# Altium PCB PCB_Horloge_DCF.PcbDoc
Units mil, origin at the board's own origin, x right, y up, seen from the top; angles counter-clockwise.
Board outline 3472.44 x 2590.55 mil, 2 copper layers (Top Layer, Bottom Layer); 28 components, 36 nets, 192 pads, 18 vias.
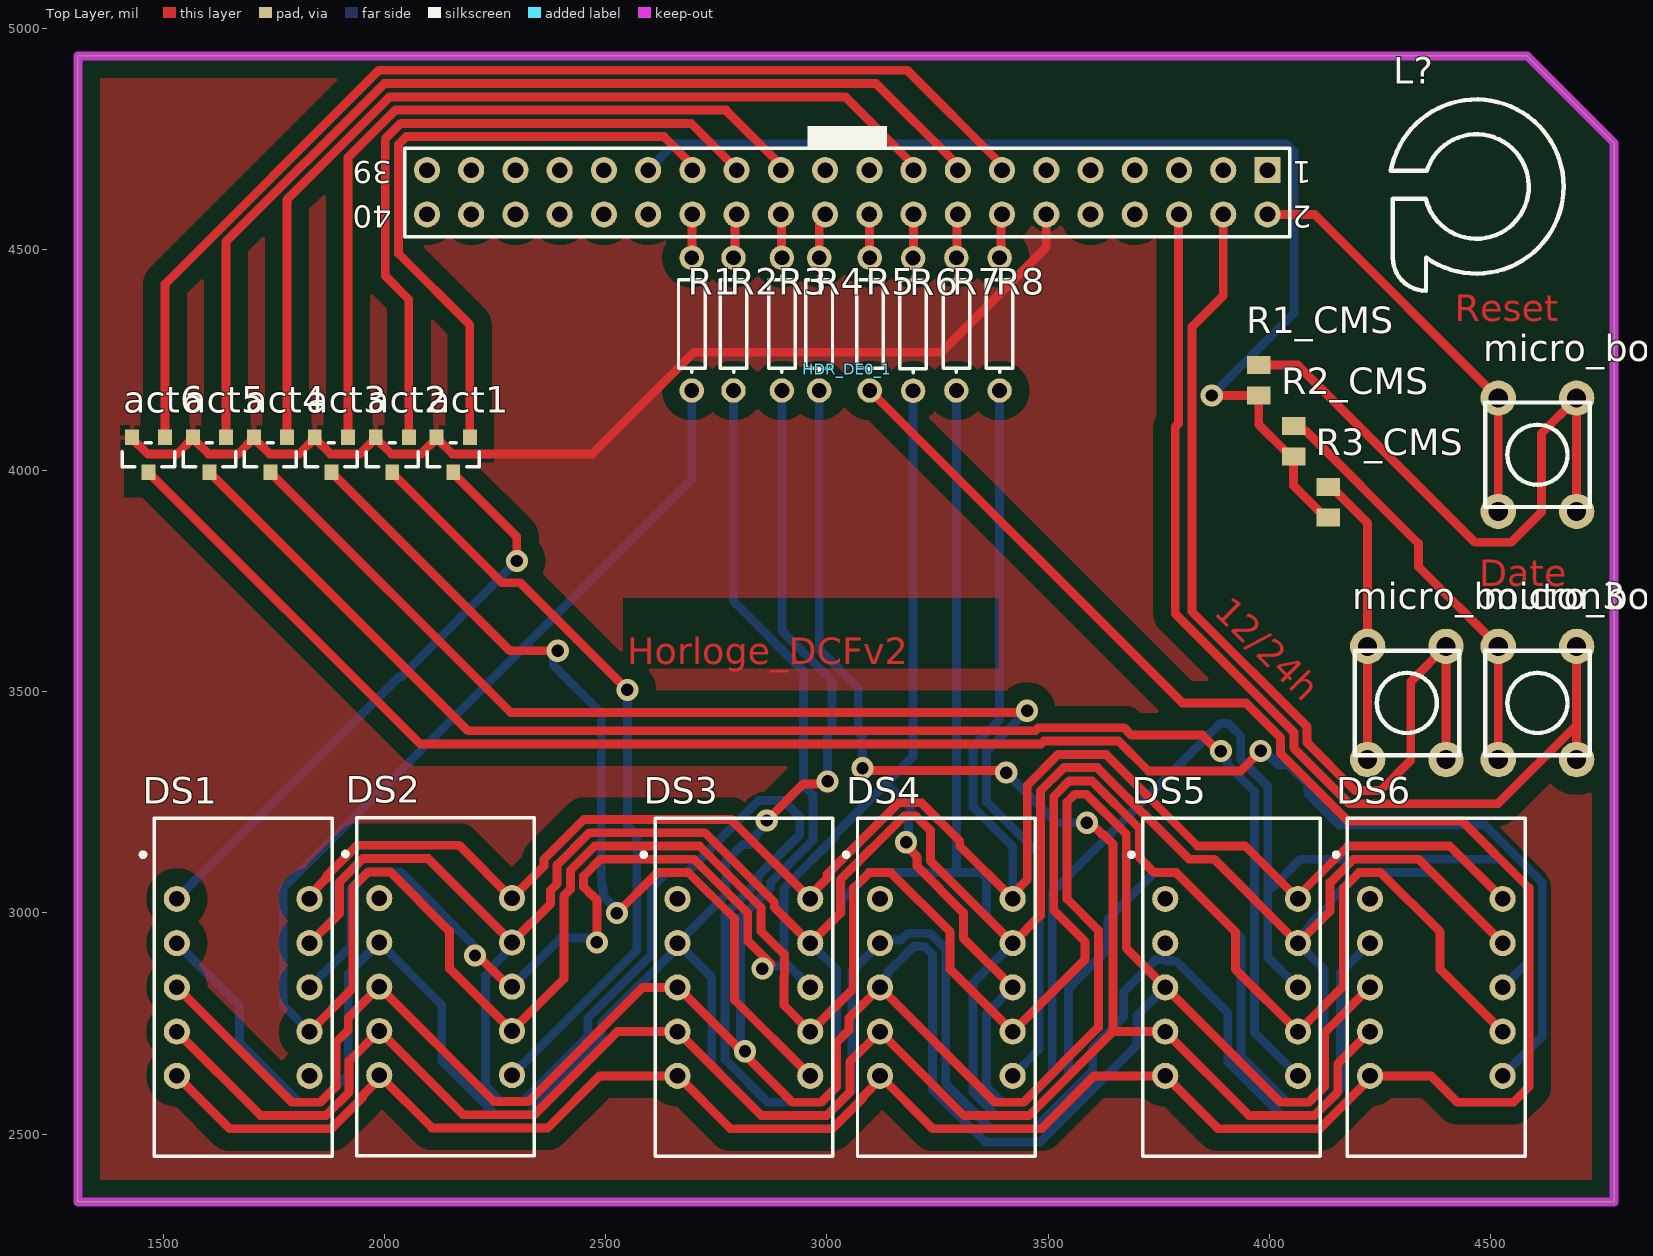
[diagram p0: Top Layer view]
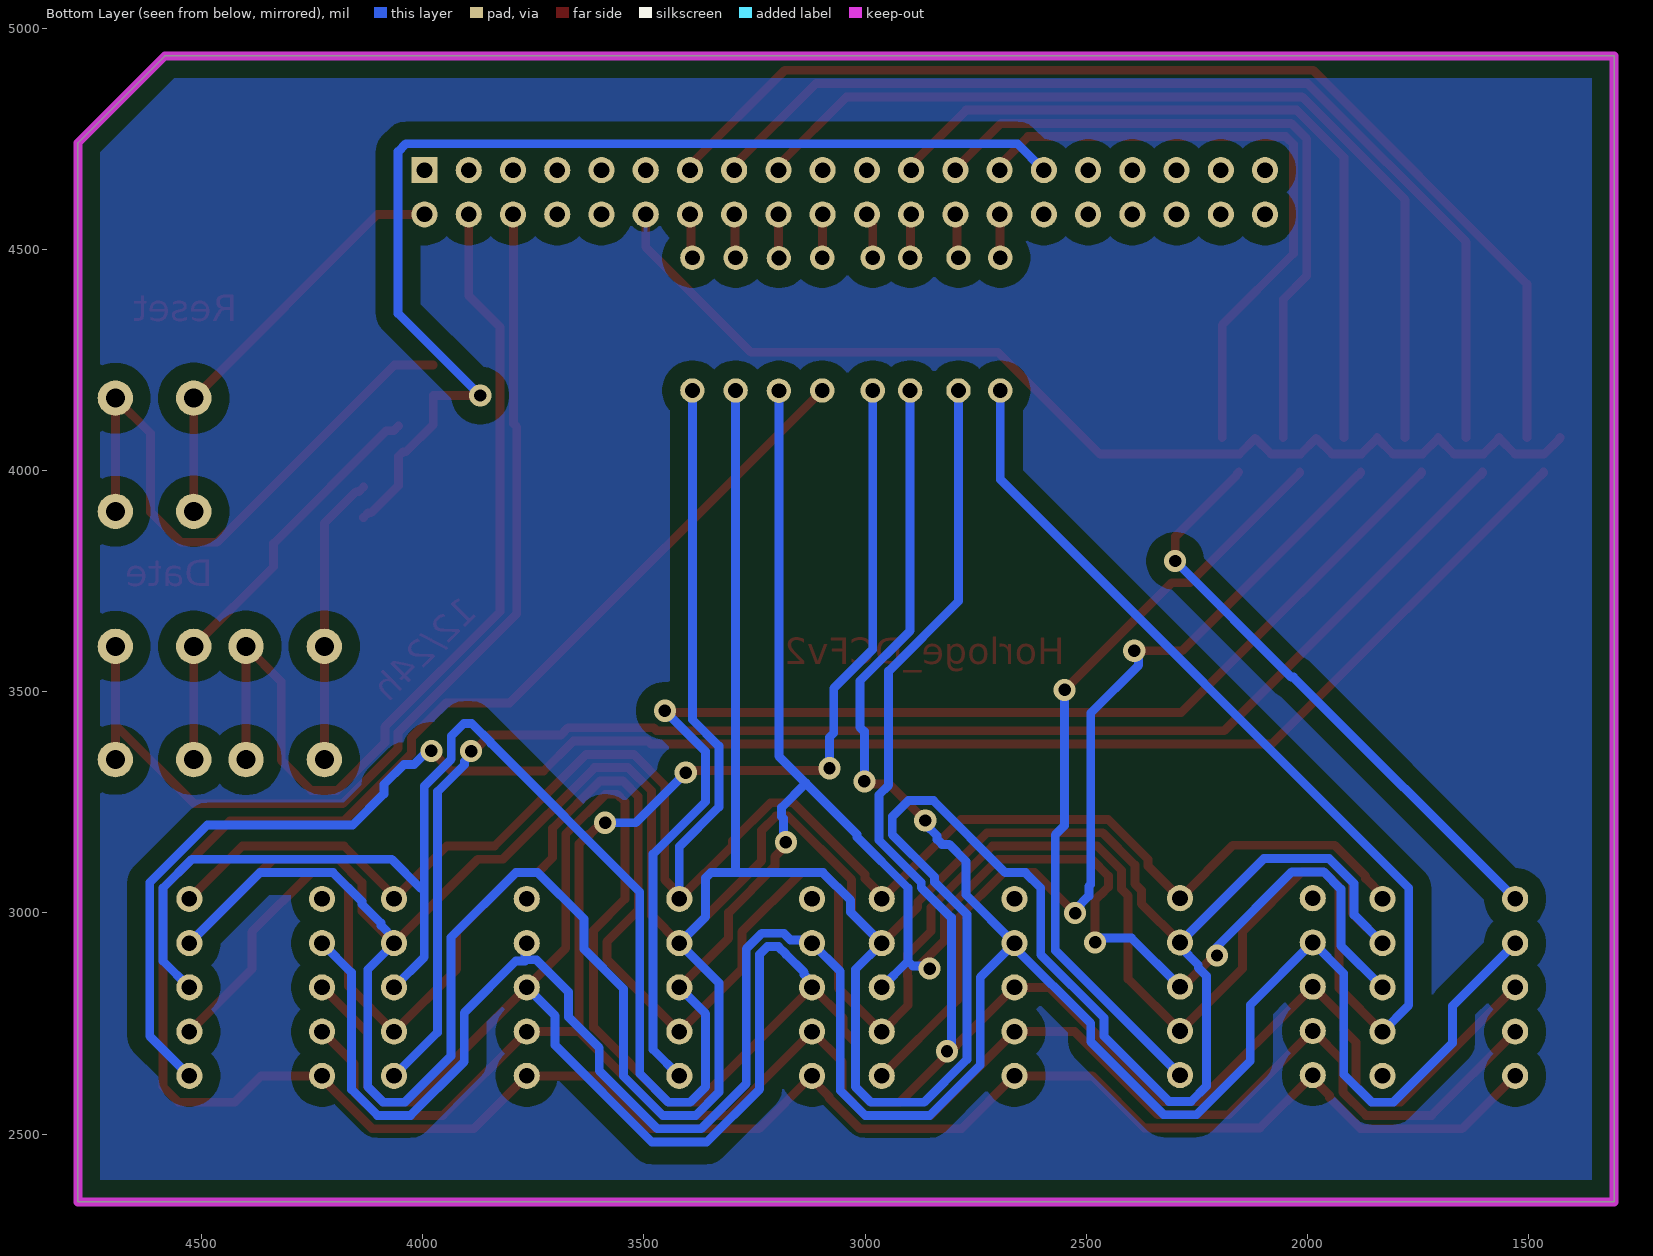
[diagram p1: Bottom Layer view, seen from below]

## Layer stack, top to bottom
Top Solder: solder mask 0.4, Solder Resist, Dk 3.5
Top Layer: signal copper 1.4
Dielectric 1: dielectric 12.6, FR-4, Dk 4.8
Bottom Layer: signal copper 1.4
Bottom Solder: solder mask 0.4, Solder Resist, Dk 3.5

## Board outline
1307.09,2346.46 4779.53,2346.46 4779.53,4740.16 4582.68,4937.01 1307.09,4937.01

## Design rules (kind name [scope] priority, off if disabled: settings)
Clearance [All] p1: gap=10 ignorepadtopadclearanceinfootprint=FALSE except(0: Arc-Hole Track-Hole SMDPad-Hole THPad-Hole Via-Hole Fill-Hole Poly-Hole Region-Hole Text-Hole; 20: Arc-THPad Track-THPad SMDPad-THPad THPad-THPad; 40: Arc-Poly Track-Poly SMDPad-Poly THPad-Poly Via-Poly Fill-Poly Poly-Poly)
PolygonConnect [All] p1: connectstyle=Relief reliefconductorwidth=10 reliefentries=4 polygonreliefangle="90 Angle" airgapwidth=10
RoutingVias [All] p1: holewidth=28 width=50 viastyle="Through Hole" minholewidth=28 minwidth=50 maxholewidth=28 maxwidth=50
SolderMaskExpansion [All] p1: expansion=4 istentingtop=FALSE
Width Width_1 [All] p1: maxlimit=20 minlimit=10 preferedwidth=20 minimp=50.000000 maximp=50.000000 favimp=50.000000
30 further rules are at their usual default settings.

## Components (designator, comment, footprint, x,y, rotation, side; value= is the part's Value field where it differs from the comment)
act1 "T_NMOS_60V_150mA_SOT23" Diodes_SOT23_0 2155.51,4035.43 r90 top
act2 "T_NMOS_60V_150mA_SOT23" Diodes_SOT23_0 2017.72,4035.43 r90 top
act3 "T_NMOS_60V_150mA_SOT23" Diodes_SOT23_0 1879.92,4035.43 r90 top
act4 "T_NMOS_60V_150mA_SOT23" Diodes_SOT23_0 1742.13,4035.43 r90 top
act5 "T_NMOS_60V_150mA_SOT23" Diodes_SOT23_0 1604.33,4035.43 r90 top
act6 "T_NMOS_60V_150mA_SOT23" Diodes_SOT23_0 1466.54,4035.43 r90 top
DS1 "5082-7613" A-10(14) 1680.71,2831.5 r0 top
DS2 "5082-7613" A-10(14) 2138.19,2833.07 r0 top
DS3 "5082-7613" A-10(14) 2812.6,2831.5 r0 top
DS4 "5082-7613" A-10(14) 3270.08,2831.5 r0 top
DS5 "5082-7613" A-10(14) 3914.96,2831.5 r0 top
DS6 "5082-7613" A-10(14) 4377.56,2831.5 r0 top
HDR_DE0_1 "Header_DE0" "ALTERA DE" 3046.06,4678.74 r180 top
L? "Component_1" POLYTECH_11MM_EMPTY 4468.5,4641.73 r0 top
micro_bouton1 "micro_bouton_poussoir" "Tactile Switch" 4606.3,4035.43 r0 top
micro_bouton2 "micro_bouton_poussoir" "Tactile Switch" 4606.3,3474.41 r180 top
micro_bouton3 "micro_bouton_poussoir" "Tactile Switch" 4311.02,3474.41 r180 top
R1 "Res1" AXIAL-0.3 2694.68,4330.71 r270 top value=15
R1_CMS "R_01K0_0805" RESC2012X05N 3976.38,4203.74 r270 top value=1K
R2 "Res1" AXIAL-0.3 2789.06,4330.71 r270 top value=15
R2_CMS "R_01K0_0805" RESC2012X05N 4055.12,4065.94 r270 top value=1K
R3 "Res1" AXIAL-0.3 2898.43,4330.71 r270 top value=15
R3_CMS "R_01K0_0805" RESC2012X05N 4133.86,3928.15 r270 top value=1K
R4 "Res1" AXIAL-0.3 2982.8,4330.71 r270 top value=15
R5 "Res1" AXIAL-0.3 3097.17,4330.71 r270 top value=15
R6 "Res1" AXIAL-0.3 3195,4330 r270 top value=15
R7 "Res1" AXIAL-0.3 3292.76,4330.71 r270 top value=15
R8 "Res1" AXIAL-0.3 3390.55,4330.71 r270 top value=15

## Footprints (in the part's own frame and the unit in brackets; to place one, negate y for a bottom-side part, rotate by r counter-clockwise, add the part's x,y. Pads: shape width x height; smd on the part's side, far side on the other; paste and mask are expansions set on the pad)
A-10(14) [mm] "LED, 7-Segment Display, 7.62 mm, RHD; 14 Leads (4 Absent); Row Space 7.62 mm; Pitch 2.54 mm"
  round 1.5 hole 0.9: 2(-3.81,5.08) 3(-3.81,2.54) 4(-3.81,0) 5(-3.81,-2.54) 6(-3.81,-5.08) 9(3.81,-5.08) 10(3.81,-2.54) 11(3.81,0) 12(3.81,2.54) 13(3.81,5.08)
  silkscreen extent -5.87,-9.7 5.1,9.7
"ALTERA DE" [mm] "Connector; Header; 20x2 Position"
  rect 1.5x1.5 hole 0.9: 1(-24.13,0)
  round 1.524 on Mech1: 1(1.27,20.32) 2(-1.27,20.32) 3(-3.81,20.32) 4(-6.35,20.32) 5(-8.89,20.32) 6(-11.43,20.32) 7(-13.97,20.32) 8(-16.51,20.32) 9(-19.05,20.32) 10(-21.59,20.32) 11(-24.13,20.32) 12(-24.13,22.86) 13(-21.59,22.86) 14(-19.05,22.86) 15(-16.51,22.86) 16(-13.97,22.86) 17(-11.43,22.86) 18(-8.89,22.86) 19(-6.35,22.86) 20(-3.81,22.86) 21(-1.27,22.86) 22(1.27,22.86) 23(3.81,22.86) 24(6.35,22.86) 25(8.89,22.86) 26(11.43,22.86) 27(13.97,22.86) 28(16.51,22.86) 29(19.05,22.86) 30(21.59,22.86) 31(24.13,22.86) 32(24.13,20.32) 33(21.59,20.32) 34(19.05,20.32) 35(16.51,20.32) 36(13.97,20.32) 37(11.43,20.32) 38(8.89,20.32) 39(6.35,20.32) 40(3.81,20.32)
  round 1.5 hole 0.9: 2(-24.13,2.54) 3(-21.59,0) 4(-21.59,2.54) 5(-19.05,0) 6(-19.05,2.54) 7(-16.51,0) 8(-16.51,2.54) 9(-13.97,0) 10(-13.97,2.54) 11(-11.43,0) 12(-11.43,2.54) 13(-8.89,0) 14(-8.89,2.54) 15(-6.35,0) 16(-6.35,2.54) 17(-3.81,0) 18(-3.81,2.54) 19(-1.27,0) 20(-1.27,2.54) 21(1.27,0) 22(1.27,2.54) 23(3.81,0) 24(3.81,2.54) 25(6.35,0) 26(6.35,2.54) 27(8.89,0) 28(8.89,2.54) 29(11.43,0) 30(11.43,2.54) 31(13.97,0) 32(13.97,2.54) 33(16.51,0) 34(16.51,2.54) 35(19.05,0) 36(19.05,2.54) 37(21.59,0) 38(21.59,2.54) 39(24.13,0) 40(24.13,2.54)
  silkscreen extent -25.4,-2.54 25.4,3.81, body extent -25.52,-1.23 25.53,3.77, height 3.15
AXIAL-0.3 [mm] "Axial Device, Thru-Hole; 2 Leads; 0.3 in Pin Spacing"
  round 1.4 hole 0.85: 1(-3.81,0) 2(3.81,0)
  silkscreen extent -2.77,-0.76 2.77,0.76
Diodes_SOT23_0 [mm]
  rect 0.9x0.8 smd paste+0 mask+0: 1(-1,0) 2(1,-0.95) 3(1,0.95)
  silkscreen extent -0.7,-1.5 0.7,1.5, body extent -1.2,-1.45 1.3,1.45, height 1.02
POLYTECH_11MM_EMPTY [mil]
  silkscreen extent -194,-236 197,197
RESC2012X05N [mm] "Chip Resistor, 2-Leads, Body 2,00x1,25mm, IPC Medium Density"
  rect 1.05x1.35 smd: 1(-0.875,0) 2(0.875,0)
  body extent -1.05,-0.67 1.05,0.67, height 0.5
"Tactile Switch" [mm] "Bouton poussoir tactile traversant"
  round 2.032 hole 1.1: 1(-2.25,-3.25) 1(-2.25,3.25) 2(2.25,-3.25) 2(2.25,3.25)
  silkscreen extent -3,-3 3,3, body extent -3.01,-3.77 3.02,3.97, height 5.01

## Part data
act1 act2 act3 act4 act5 act6: "BS170F MOSFET N-CH 60V 150mA SOT23", Supplier Part Number 1=9227822, Mounting=YES, Supplier 1=RSComponents
DS1 DS2 DS3 DS4 DS5 DS6: "7.62 mm HER 7-Segment Display: CC, RH DP", LED_Colour="High Efficiency Red (HER)", PackageDocument=27-Aug-2001, ComponentLink1Description="Manufacturer Link", ComponentLink1URL=http://www.agilent.com/, ComponentLink2Description=Datasheet, ComponentLink2URL=http://cp.literature.agilent.com/litweb/pdf/5988-3325EN.pdf, DatasheetDocument=27-Aug-2001, LatestRevisionDate=11-Oct-2004, LatestRevisionNote="Display outline superimposed on PCB Footprint.", LuminousIntensity="340 ucd (Minimum).", Note="Pins 2 and 9 are redundant Cathodes.", PackageReference=A-10(14), Published=26-May-2004, Publisher="Altium Limited"
HDR_DE0_1: "HE10 40pins DE0", Supplier Part Number 1=2217597, Supplier 1=Farnell
L?: "Logo_POLYTECH"
micro_bouton1 micro_bouton2 micro_bouton3: Supplier Part Number 1=1555991, Supplier 1=Farnell, Supplier 2=Farnell, Supplier Part Number 2=1555982
R1 R2 R3 R4 R5 R6 R7 R8: "Resistor", LatestRevisionDate=17-Jul-2002, LatestRevisionNote="Re-released for DXP Platform.", PackageDescription="Axial Device, Thru-Hole; 2 Leads; 0.3 in Pin Spacing", PackageReference=AXIAL-0.3, Published=8-Jun-2000, Publisher="Altium Limited"
R1_CMS R2_CMS R3_CMS: "Resistor 1K Ohms 1/4W 0805 1%", Mounting=YES

## Via types
v1: diameter 50, hole 28, Top Layer to Bottom Layer, 18 vias

## Nets (pads, with @x,y where several pads share a name; then routed paths per layer and width w, separated by ;. In a path a pad name is that pad's centre, name@x,y a point inside that pad or via, vN(x,y) a via of type N, cw(c..) or ccw(c..) an arc to the next point about the centre after c; other vN are vias at no path point)
GND: act1.3 act2.3 act3.3 act4.3 act5.3 act6.3 HDR_DE0_1.12@3496.06,4578.74 | length 2505.3
  Top Layer w20: act6.3 1429.13,4072.83 1464.88,4037.09 1531.18,4037.09 act5.3@1566.93,4072.83 ; act5.3 act5.3@1566.93,4072.83 ; act4.3 act4.3@1704.72,4072.83 ; act3.3 act3.3@1842.52,4072.83 ; HDR_DE0_1.12@3496.06,4578.74 3496.06,4504.82 3258.46,4267.22 2699.79,4267.22 2469.66,4037.09 2153.86,4037.09 2118.11,4072.83 2082.36,4037.09 2016.06,4037.09 1980.32,4072.83 1944.57,4037.09 1878.27,4037.09 act3.3@1842.52,4072.83 ; act5.3@1566.93,4072.83 1602.68,4037.09 1668.98,4037.09 act4.3@1704.72,4072.83 ; act4.3@1704.72,4072.83 1740.47,4037.09 1806.77,4037.09 act3.3@1842.52,4072.83
Netact1_1: act1.1 DS1.2 | length 1345.2
  Top Layer w20: act1.1 2161.26,3990.31 2161.26,3988.35 2299.21,3850.39 v1(2299.21,3795.28)
  Bottom Layer w20: DS1.2 2032.17,3532.95 2036.89,3532.95 v1(2299.21,3795.28)
Netact1_2: act1.2 HDR_DE0_1.27@2696.06,4678.74 | length 1420.2
  Top Layer w20: act1.2 2192.91,4329.13 2031.81,4490.23 2031.81,4736.84 2049.39,4754.41 2631.81,4754.41 HDR_DE0_1.27@2691.34,4694.88
Netact2_1: act2.1 DS2.9 | length 1733
  Top Layer w20: act2.1 2017.72,3994.09 2265.67,3746.14 2307.01,3746.14 v1(2549.21,3503.94)
  Bottom Layer w20: DS2.9 2570.32,2915.2 2570.32,3176.6 2549.21,3197.7 v1(2549.21,3503.94)
Netact2_2: act2.2 HDR_DE0_1.25@2796.06,4678.74 | length 1537.7
  Top Layer w20: act2.2 2055.12,4386.36 2001.81,4439.67 2001.81,4749.26 2036.96,4784.41 2692.85,4784.41 2782.38,4694.88 HDR_DE0_1.25@2791.34,4694.88
Netact3_1: act3.1 DS3.9 | length 2100.9
  Top Layer w20: act3.1 1879.92,3994.09 1885.67,3988.35 1887.64,3988.35 2283.46,3592.52 v1(2391.73,3592.52) ; v1@2522.2,2996.12 2617.1,3091.02 2687.26,3091.02 2791.19,2987.09 2791.19,2802.9 DS3.9
  Bottom Layer w20: v1@2381.89,3582.68 2381.89,3559.94 2490.16,3451.67 2490.16,3064.24 2494.27,3060.12 2494.27,3038.39 2525.32,3007.35 v1(2525.32,2999.23)
Netact3_2: act3.2 HDR_DE0_1.23@2896.06,4678.74 | length 1700.3
  Top Layer w20: act3.2 1917.32,4707.2 2024.53,4814.41 2771.81,4814.41 HDR_DE0_1.23@2891.34,4694.88
Netact4_1: act4.1 DS4.9 | length 2875.9
  Top Layer w20: act4.1 1742.13,3994.09 1747.87,3988.35 1749.84,3988.35 2285.43,3452.76 3448.82,3452.76 v1(3452.76,3456.69)
  Bottom Layer w20: DS4.9 3479.61,2691.02 3479.61,3132.62 3360.51,3251.71 3360.51,3364.45 v1(3452.76,3456.69)
Netact4_2: act4.2 HDR_DE0_1.17@3196.06,4678.74 | length 2107.1
  Top Layer w20: act4.2 1779.53,4611.83 2012.11,4844.41 3041.81,4844.41 HDR_DE0_1.17@3191.34,4694.88
Netact5_1: act5.1 DS5.9 | length 3360.3
  Top Layer w20: act5.1 1604.33,3994.09 1610.08,3988.35 1612.05,3988.35 2188.7,3411.69 3471.4,3411.69 3477.89,3418.19 3671.81,3418.19 3688.43,3401.57 3848.79,3401.57 3884.77,3365.6 v1(3890.59,3365.6)
  Bottom Layer w20: v1(3890.59,3365.6) 3890.59,3357.48 3905.59,3342.48 3905.59,3334.96 3966.65,3273.9 3966.65,2729.8 DS5.9
Netact5_2: act5.2 HDR_DE0_1.15@3296.06,4678.74 | length 2313.9
  Top Layer w20: act5.2 1641.73,4516.46 1999.68,4874.41 3111.81,4874.41 HDR_DE0_1.15@3291.34,4694.88
Netact6_1: act6.1 DS6.9 | length 4065.5
  Top Layer w20: act6.1 1466.54,3994.09 1472.28,3988.35 1474.25,3988.35 2080.91,3381.69 3483.82,3381.69 3490.32,3388.19 3659.38,3388.19 3726.98,3320.6 3935.16,3320.6 v1(3980.59,3366.03)
  Bottom Layer w20: v1(3980.59,3366.03) 3988.71,3366.03 4019.12,3335.61 4042.1,3335.61 4087.75,3289.97 4087.75,3268.75 4158.07,3198.43 4487.23,3198.43 4617.09,3068.58 4617.09,2721.02 DS6.9
Netact6_2: act6.2 HDR_DE0_1.13@3396.06,4678.74 | length 2520.7
  Top Layer w20: act6.2 1503.94,4421.09 1987.25,4904.41 3181.81,4904.41 HDR_DE0_1.13@3391.34,4694.88
NetDS1_3: DS1.3 DS2.3 DS3.3 DS4.3 DS5.3 DS6.3 R3.2 | length 6831.2
  Top Layer w20: v1(2864.17,3208.66) 2947.02,3291.5 2996.1,3291.5 v1(3001.84,3297.24)
  Bottom Layer w20: DS1.3 1672.12,2790.09 1672.12,2705.9 1806.05,2571.97 1855.37,2571.97 1918.04,2634.64 1918.04,2862.92 DS2.3 2129.6,2791.66 2129.6,2665.05 2251.11,2543.54 2325.27,2543.54 2490.2,2708.47 2490.2,2750.23 2662.6,2922.63 DS3.3 ; v1(2864.17,3208.66) 2864.17,3200.54 2837.27,3173.64 2837.27,3165.97 2826.11,3154.81 2810.32,3154.81 2772.04,3116.53 2772.04,3040.94 DS3.3 ; R3.2 2898.43,3637.49 3011.81,3524.11 3011.81,3419.72 3001.84,3409.75 v1(3001.84,3297.24) ; 3760.78,2893.92 3743.2,2893.92 3670.71,2821.43 3670.71,2764.75 3601.11,2695.16 3601.11,2643.49 3469.59,2511.97 3370.57,2511.97 3268.66,2613.88 3268.66,2918.55 3233.51,2953.7 3183.81,2953.7 3169.08,2938.97 3127.55,2938.97 DS4.3 3056.14,2867.56 3056.14,2598.43 2999.68,2541.97 2853.93,2541.97 2739.96,2655.94 2739.96,2854.13 DS3.3 ; DS5.3 3769.15,2927.31 3769.15,2891.02 3789.62,2891.02 3906.37,2774.27 3906.37,2663.48 4027.88,2541.97 4102.04,2541.97 4161.07,2600.99 4161.07,2865 DS6.3
NetDS1_4: DS1.4 DS2.4 DS3.4 DS4.4 DS5.4 DS6.4 R2.2 | length 7788
  Top Layer w20: DS1.4 1790.24,2571.97 1855.37,2571.97 1890.24,2606.84 1890.24,2706.84 1918.04,2734.64 1918.04,2762.92 DS2.4 2247.72,2573.54 2326.18,2573.54 2584.13,2831.5 DS3.4 2922.13,2571.97 2987.26,2571.97 3022.13,2606.84 3022.13,2706.84 3049.93,2734.64 3049.93,2761.35 DS4.4 3379.61,2571.97 3444.74,2571.97 3613.93,2741.16 3613.93,2960.34 3542.83,3031.43 3542.83,3250.62 3560.41,3268.19 3586.79,3268.19 3676.69,3178.29 3676.69,2919.77 DS5.4 4024.49,2571.97 4089.62,2571.97 4124.85,2607.2 4124.85,2728.79 DS6.4
  Bottom Layer w20: R2.2 2789.06,3704.44 2947.13,3546.37 2947.13,3288.31 2968.7,3266.74 2968.7,3164.21 2873.07,3068.58 2873.07,3057.12 2805.12,2989.16 v1@2805.12,2677.17 ; DS4.4 3120.08,2842.06 3138.1,2860.08 3138.1,2865.33 3178.66,2905.89 3178.66,2906.13 3196.24,2923.7 3221.09,2923.7 3238.66,2906.13 3238.66,2601.45 3358.14,2481.97 3482.02,2481.97 3700.71,2700.66 3700.71,2767.24 DS5.4
  other v1: 2814.96,2687.01
NetDS1_5: DS1.5 DS2.5 DS3.5 DS4.5 DS5.5 DS6.5 R4.2 | length 5556.9
  Top Layer w20: DS1.5 1720.24,2541.97 1867.79,2541.97 1920.24,2594.41 1920.24,2665.12 DS2.5 2177.72,2543.54 2338.61,2543.54 2526.56,2731.5 DS3.5 2852.13,2541.97 2999.68,2541.97 3052.13,2594.41 3052.13,2663.54 DS4.5 3309.61,2541.97 3457.16,2541.97 3646.69,2731.5 ; v1(3080.71,3326.77) 3085.63,3321.85 3400.59,3321.85 v1(3405.51,3316.93) ; v1(3587.83,3203.5) 3595.95,3203.5 3622.19,3177.26 3625.23,3177.26 3646.69,3155.81 3646.69,2731.5 ; DS6.5 4154.85,2658.79 4154.85,2594.78 4102.04,2541.97 3954.49,2541.97 DS5.5 3646.69,2731.5
  Bottom Layer w20: R4.2 2982.8,3595.55 3070.87,3507.48 3070.87,3406.42 3080.71,3396.58 v1(3080.71,3326.77) ; v1(3405.51,3316.93) 3518.94,3203.5 v1(3587.83,3203.5)
NetDS1_6: DS1.6 DS2.6 DS3.6 DS4.6 DS5.6 DS6.6 R5.2 | length 6043.4
  Top Layer w20: DS1.6 1650.24,2511.97 1880.22,2511.97 1950.24,2581.99 1950.24,2586.84 1988.19,2624.79 DS2.6 2107.72,2513.54 2368.8,2513.54 2486.76,2631.5 DS3.6 2782.13,2511.97 3012.11,2511.97 3082.13,2581.99 3082.13,2585.26 3120.08,2623.22 DS4.6 3239.61,2511.97 3485.14,2511.97 3604.67,2631.5 DS5.6 3884.49,2511.97 4114.47,2511.97 4227.56,2625.06 DS6.6 4365.41,2631.5 4424.94,2571.97 4552.22,2571.97 4587.09,2606.84 4587.09,3056.15 4435.43,3207.81 4177.24,3207.81 4025.59,3359.46 4025.59,3395.67 3946.85,3474.41 3803.46,3474.41 R5.2
  Bottom Layer w20: R5.2@3091.26,4174.8 R5.2
NetDS1_10: DS1.10 DS2.10 DS3.10 DS4.10 DS5.10 DS6.10 R1.2 | length 7446.8
  Top Layer w20: DS1.10 1928.66,2829.45 1928.66,3057.73 1963.53,3092.6 2012.85,3092.6 2146.78,2958.66 2146.78,2874.48 DS2.10 2405.56,2850.44 2405.56,3038.54 2420.32,3053.29 2420.32,3095.72 2475.62,3151.02 2712.11,3151.02 2851.19,3011.94 2851.19,2958.72 2904.02,2905.89 2904.02,2857.1 2903.07,2856.15 2903.07,2791.02 DS3.10 3060.55,2829.45 3060.55,3056.15 3095.42,3091.02 3144.74,3091.02 3278.67,2957.09 3278.67,2872.9 DS4.10 3583.93,2895.34 3583.93,2934.65 3512.83,3005.74 3512.83,3263.04 3547.98,3298.19 3599.22,3298.19 3706.69,3190.71 3706.69,3124.64 3740.3,3091.02 3789.62,3091.02 3923.55,2957.09 3923.55,2872.9 DS5.10 4167.67,2834.2 4167.67,3055.79 4202.9,3091.02 4252.22,3091.02 4386.15,2957.09 4386.15,2872.9 DS6.10
  Bottom Layer w20: DS1.10 1771.18,2791.02 1771.18,3056.15 2694.68,3979.66 R1.2
NetDS1_11: DS1.11 DS2.11 DS3.11 DS4.11 DS5.11 DS6.11 R6.2 | length 6796.1
  Top Layer w20: v1(2204.72,2903.54) 2211.22,2903.54 2281.69,2833.07 DS2.11 ; v1(2480.32,2933.07) 2480.32,3029.15 2468.6,3040.87 2467.89,3040.87 2450.32,3058.44 2450.32,3083.29 2488.05,3121.02 2699.68,3121.02 2821.19,2999.52 2821.19,2936.68 v1@2874.02,2883.86 ; v1(3179.13,3159.45) 3179.13,3151.33 3203.98,3126.49 3203.98,3105.17 3308.67,3000.48 3308.67,2942.9 DS4.11
  Bottom Layer w20: DS1.11 1924.64,2925.43 1924.64,3053.71 1963.53,3092.6 2035.35,3092.6 v1@2204.72,2923.23 ; DS2.11 2398.03,2942.91 v1@2470.47,2942.91 ; v1(2854.33,2874.02) 2860.07,2879.76 2891.8,2879.76 2903.07,2891.02 ; DS3.11 2903.07,2891.02 ; v1(3179.13,3159.45) 3184.87,3165.19 3184.87,3213.31 3188.98,3217.41 3188.98,3238.19 3134.04,3293.12 ; R6.2 3195,3354.08 3134.04,3293.12 ; DS4.11 3360.55,2771.97 3360.55,2606.84 3395.42,2571.97 3444.74,2571.97 3509.61,2636.84 3509.61,3047.01 3845.59,3382.99 3845.59,3384.24 3889.42,3428.06 3907.23,3428.06 3935.59,3399.7 3935.59,3347.39 3996.65,3286.32 3996.65,3056.15 3996.65,2899.8 DS5.11 ; 4005.43,3056.15 4070.3,3121.02 4522.22,3121.02 4587.09,3056.15 4587.09,2891.02 DS6.11 ; 2903.07,2891.02 2903.07,3056.15 3018.56,3171.64 3018.56,3177.64 3134.04,3293.12
NetDS1_12: DS1.12 DS2.12 DS3.12 DS4.12 DS5.12 DS6.12 R7.2 | length 12241.6
  Top Layer w20: DS1.12 1898.66,2999.45 1898.66,3070.15 1951.11,3122.6 2098.66,3122.6 DS2.12 2375.56,3020.44 2375.56,3050.97 2390.32,3065.72 2390.32,3108.15 2463.19,3181.02 2724.53,3181.02 2881.19,3024.37 2881.19,3012.9 DS3.12 3030.55,2999.45 3030.55,3074.51 3175.02,3218.98 3201.4,3218.98 3233.98,3186.4 3233.98,3117.6 DS4.12 3482.83,2994.25 3482.83,3275.47 3535.56,3328.19 3611.64,3328.19 3818.81,3121.02 3875.43,3121.02 DS5.12 4137.67,3004.2 4137.67,3068.22 4190.48,3121.02 4338.03,3121.02 DS6.12
  Bottom Layer w20: DS1.12 1894.64,2995.43 1894.64,3066.14 1951.11,3122.6 2098.66,3122.6 DS2.12 2288.19,2923.37 2246.93,2882.11 2246.93,2876 2228.66,2857.73 2228.66,2608.41 2263.53,2573.54 2312.85,2573.54 2460.2,2720.9 2460.2,2762.65 2603.07,2905.53 2603.07,3056.15 2637.94,3091.02 2682.9,3091.02 2845.53,3253.66 2902.5,3253.66 2938.7,3217.46 2938.7,3176.64 2843.07,3081.01 2843.07,3069.54 2769.96,2996.43 2769.96,2668.37 2866.36,2571.97 2987.26,2571.97 3022.13,2606.84 3022.13,2871.97 DS3.12 3032.75,3001.64 3032.75,3028.35 3095.42,3091.02 3287.4,3091.02 ; R7.2 3292.76,3096.38 3287.4,3091.02 ; DS6.12 4368.03,3091.02 4202.9,3091.02 4137.67,3025.79 4137.67,3020.02 4094.49,2976.84 4094.49,2971.59 4064.96,2942.06 DS5.12 4124.49,2871.97 4124.49,2606.84 4089.62,2571.97 4040.3,2571.97 3936.37,2675.9 3936.37,2944.27 3789.62,3091.02 3740.3,3091.02 3635.34,2986.06 3635.34,2917.58 3546.25,2828.5 3546.25,2631.06 3457.16,2541.97 3383,2541.97 3330.55,2594.41 3330.55,2841.97 DS4.12 3360.55,2991.02 3360.55,3079.31 3348.84,3091.02 3287.4,3091.02
NetDS1_13: DS1.13 DS2.13 DS3.13 DS4.13 DS5.13 DS6.13 R8.2 | length 4873.9
  Top Layer w20: DS1.13 1830.71,3039.78 1868.66,3077.73 1868.66,3082.58 1938.68,3152.6 2168.66,3152.6 DS2.13 2360.32,3105.2 2360.32,3120.57 2450.77,3211.02 2783.07,3211.02 DS3.13 2962.6,3039.78 3000.55,3077.73 3000.55,3086.93 3162.6,3248.98 3213.83,3248.98 3300.55,3162.25 3300.55,3151.02 DS4.13 3420.08,3042.06 3452.83,3074.82 3452.83,3287.89 3523.13,3358.19 3630.7,3358.19 3837.86,3151.02 3945.43,3151.02 DS5.13 4064.96,3037.93 4178.05,3151.02 4408.03,3151.02 DS6.13
  Bottom Layer w20: R8.2 3390.55,3436.91 3330.51,3376.88 3330.51,3239.29 3420.08,3149.72 DS4.13
NetHDR_DE0_1_2: HDR_DE0_1.2@3996.06,4578.74 micro_bouton1.1 | length 949.6
  Top Layer w20: HDR_DE0_1.2@3996.06,4578.74 4102.36,4578.74 4517.72,4163.39 micro_bouton1.1@4517.72,3907.48
NetHDR_DE0_1_4: HDR_DE0_1.4@3896.06,4578.74 micro_bouton3.1 | length 2185.4
  Top Layer w20: HDR_DE0_1.4@3896.06,4578.74 3896.06,4394.9 3825.08,4323.92 3825.08,3681.03 4085.59,3420.52 4085.59,3384.31 4193.45,3276.46 4251.44,3276.46 4319.78,3344.8 4319.78,3522.54 4399.61,3602.36 micro_bouton3.1@4399.61,3346.46
NetHDR_DE0_1_6: HDR_DE0_1.6@3796.06,4578.74 micro_bouton2.1 | length 2342.5
  Top Layer w20: HDR_DE0_1.6@3796.06,4578.74 3795.08,4577.76 3795.08,4106.33 3787.4,4098.65 3787.4,3676.28 4055.59,3408.1 4055.59,3371.89 4181.02,3246.46 4516.71,3246.46 4694.88,3424.63 ; micro_bouton2.1@4694.88,3346.46 4694.88,3424.63 ; micro_bouton2.1@4694.88,3602.36 4694.88,3424.63
NetHDR_DE0_1_14: HDR_DE0_1.14@3396.06,4578.74 R8.1 | length 100.3
  Top Layer w20: R8.1 3393.31,4483.46 3393.31,4575.98 HDR_DE0_1.14@3396.06,4578.74
NetHDR_DE0_1_16: HDR_DE0_1.16@3296.06,4578.74 R7.1 | length 99.4
  Top Layer w20: R7.1 3294.41,4482.36 3294.41,4577.09 HDR_DE0_1.16@3296.06,4578.74
NetHDR_DE0_1_18: HDR_DE0_1.18@3196.06,4578.74 R6.1 | length 110.4
  Top Layer w20: HDR_DE0_1.18@3191.34,4594.88 HDR_DE0_1.18@3199.29,4586.93 ; R6.1 3195.53,4480.53 3195.53,4578.21 HDR_DE0_1.18@3196.06,4578.74
NetHDR_DE0_1_20: HDR_DE0_1.20@3096.06,4578.74 R5.1 | length 98.5
  Top Layer w20: HDR_DE0_1.20@3096.06,4578.74 3096.61,4578.19 3096.61,4481.26 R5.1
NetHDR_DE0_1_22: HDR_DE0_1.22@2996.06,4578.74 R4.1 | length 107.4
  Top Layer w20: R4.1 2982.8,4554.9 2996.06,4568.17 HDR_DE0_1.22@2996.06,4578.74 ; HDR_DE0_1.22@2991.34,4591.01 HDR_DE0_1.22@2991.34,4594.88
NetHDR_DE0_1_24: HDR_DE0_1.24@2896.06,4578.74 R3.1 | length 100.7
  Top Layer w20: HDR_DE0_1.24@2891.34,4594.88 HDR_DE0_1.24@2892.52,4593.7 ; HDR_DE0_1.24@2896.06,4578.74 2897.24,4577.56 2897.24,4481.89 R3.1
NetHDR_DE0_1_26: HDR_DE0_1.26@2796.06,4578.74 R2.1 | length 111.5
  Top Layer w20: R2.1 2792.56,4484.21 2792.56,4575.24 HDR_DE0_1.26@2796.06,4578.74 ; HDR_DE0_1.26@2791.34,4584.31 HDR_DE0_1.26@2791.34,4594.88
NetHDR_DE0_1_28: HDR_DE0_1.28@2696.06,4578.74 R1.1 | length 98.6
  Top Layer w20: R1.1 2695.37,4481.4 2695.37,4578.05 HDR_DE0_1.28@2696.06,4578.74
NetHDR_DE0_1_29: HDR_DE0_1.29@2596.06,4678.74 R1_CMS.2 R2_CMS.2 R3_CMS.2 | length 2574.6
  Top Layer w20: v1(3870.08,4169.29) R1_CMS.2 3976.38,4103.61 4037.82,4042.17 4044.45,4042.17 R2_CMS.2 4055.12,3965.81 4116.56,3904.37 4123.19,3904.37 R3_CMS.2
  Bottom Layer w20: HDR_DE0_1.29@2596.06,4678.74 2655.59,4738.27 4038.02,4738.27 4055.59,4720.69 4055.59,4354.8 v1(3870.08,4169.29)
Netmicro_bouton1_2: micro_bouton1.2 R1_CMS.1 | length 1379.5
  Top Layer w20: R1_CMS.1 4064.14,4238.19 4464.85,3837.48 4546.71,3837.48 4615.06,3905.83 4615.06,4083.56 4694.88,4163.39 micro_bouton1.2@4694.88,3907.48
Netmicro_bouton2_2: micro_bouton2.2 R2_CMS.1 | length 955.2
  Top Layer w20: R2_CMS.1 4065.79,4089.72 4082.26,4089.72 4337.48,3834.51 4337.48,3782.6 4517.72,3602.36 micro_bouton2.2@4517.72,3346.46
Netmicro_bouton3_2: micro_bouton3.2 R3_CMS.1 | length 656.7
  Top Layer w20: R3_CMS.1 4144.53,3951.93 4151.16,3951.93 4222.44,3880.65 4222.44,3602.36 micro_bouton3.2@4222.44,3346.46
pads on no net: DS1.9 DS2.2 DS3.2 DS4.2 DS5.2 DS6.2 HDR_DE0_1.1 HDR_DE0_1.2@3096.06,3878.74 HDR_DE0_1.3 HDR_DE0_1.4@3296.06,3878.74 HDR_DE0_1.5 HDR_DE0_1.6@3496.06,3878.74 HDR_DE0_1.7 HDR_DE0_1.8 HDR_DE0_1.9 HDR_DE0_1.10 HDR_DE0_1.11 HDR_DE0_1.12@3996.06,3778.74 HDR_DE0_1.13@3896.06,3778.74 HDR_DE0_1.14@3796.06,3778.74 HDR_DE0_1.15@3696.06,3778.74 HDR_DE0_1.16@3596.06,3778.74 HDR_DE0_1.17@3496.06,3778.74 HDR_DE0_1.18@3396.06,3778.74 HDR_DE0_1.19 HDR_DE0_1.20@3196.06,3778.74 HDR_DE0_1.21 HDR_DE0_1.22@2996.06,3778.74 HDR_DE0_1.23@2896.06,3778.74 HDR_DE0_1.24@2796.06,3778.74 HDR_DE0_1.25@2696.06,3778.74 HDR_DE0_1.26@2596.06,3778.74 HDR_DE0_1.27@2496.06,3778.74 HDR_DE0_1.28@2396.06,3778.74 HDR_DE0_1.29@2296.06,3778.74 HDR_DE0_1.30 HDR_DE0_1.31 HDR_DE0_1.32 HDR_DE0_1.33 HDR_DE0_1.34 HDR_DE0_1.35 HDR_DE0_1.36 HDR_DE0_1.37 HDR_DE0_1.38 HDR_DE0_1.39 HDR_DE0_1.40

## Polygon pours and split planes (outlines as drawn)
GND on Bottom Layer "GND_L02_P008" (solid, remove dead copper, pour order 8): 1307.09,4937.01 4582.68,4937.01 4779.53,4740.16 4779.53,2346.46 1307.09,2346.46
no net on Bottom Layer "NONET_L02_P002" (solid, shelved, pour order 2): 1307.09,4937.01 4582.68,4937.01 4779.53,4740.16 4779.53,2346.46 1307.09,2346.46
GND on Top Layer "GND_L01_P007" (solid, remove dead copper, pour order 7): 1307.09,4937.01 4582.68,4937.01 4779.53,4740.16 4779.53,2346.46 1307.09,2346.46
no net on Top Layer "NONET_L01_P001" (solid, shelved, pour order 1): 1307.09,4937.01 4582.68,4937.01 4779.53,4740.16 4779.53,2346.46 1307.09,2346.46

## Keep-outs
Keep-Out Layer:
  the board outline again, w20

## Other copper
Top Layer:
  text "Reset" at 4419.45,4336.77 h60
  text "Date" at 4474.57,3738.35 h60
  text "12/24h" at 3872.41,3677.24 h60 r315.28
  text "Horloge_DCFv2" at 2549.21,3561.9 h60

## Silkscreen, mask and mechanical layers (free items; w line width, h text height)
Route Tool Path:
  lines w78.74: 4779.53,2307.09 1307.09,2307.09 ; 4818.9,2346.46 4818.9,4740.16 ; 1267.72,2346.46 ccw(c1307.09,2346.46) 1307.09,2307.09 ; 1267.72,2346.46 ccw(c1307.09,2346.46) 1307.09,2307.09 ; 1267.72,2346.46 1267.72,4937.01 ; 1267.72,4937.01 cw(c1307.09,4937.01) 1307.09,4976.38 ; 1267.72,4937.01 cw(c1307.09,4937.01) 1307.09,4976.38 ; 1307.09,4976.38 4582.68,4976.38 ; 4582.68,4976.38 cw(c4582.68,4937.01) 4610.52,4964.85 ; 4582.68,4976.38 cw(c4582.68,4937.01) 4610.52,4964.85 ; 4610.52,4964.85 4807.37,4768 ; 4807.37,4768 cw(c4779.53,4740.16) 4818.9,4740.16 ; 4807.37,4768 cw(c4779.53,4740.16) 4818.9,4740.16

## Dimensions
4582.68,4976.38 to 4818.9,4740.16 on Dimensions
4610.52,4964.85 to 4818.9,4740.16 on Dimensions
4694.88,3602.36 to 4694.88,3907.48 on Dimensions
4488.19,4153.54 to 4724.41,3917.32 on Dimensions
4694.88,3346.46 to 4818.9,2346.46 on Dimensions
1334.65,3161.42 to 1307.09,4937.01 on Dimensions
4222.44,3346.46 to 4694.88,3346.46 on Dimensions
4694.88,3346.46 to 4694.88,3602.36 on Dimensions
1307.09,2346.46 to 1307.09,4937.01 on Dimensions
1307.09,2346.46 to 4779.53,2346.46 on Dimensions
2518.7,2295.28 to 3551.18,2270.51 on Dimensions
3551.18,2392.72 to 3691.93,2431.1 on Dimensions
2377.95,2333.66 to 2518.7,2372.05 on Dimensions

## Text inside footprints (layer, text, board x,y; h text height)
HDR_DE0_1: Route Tool Path "GPIO_1" at 4946.06,4228.74 h60 r180; Route Tool Path "GPIO_0" at 4946.06,3128.74 h60 r180; Route Tool Path "800 mil" at 2996.06,4428.74 h60 r270; Route Tool Path "KEEP OUT PORT" at 5096.06,3328.74 h60 r180; Route Tool Path "KEEP OUT PORT" at 5096.06,4128.74 h60 r180; Top Overlay "1" at 4096.06,4698.74 h50 r180; Top Overlay "2" at 4096.06,4598.74 h50 r180; Top Overlay "40" at 2016.06,4598.74 h50 r180; Top Overlay "39" at 2016.06,4698.74 h50 r180